# Altium PCB roboShieldMega.PcbDoc
Units mil, origin at the board's own origin, x right, y up, seen from the top; angles counter-clockwise.
Board outline 3683 x 2196 mil, 2 copper layers (Top Layer, Bottom Layer); 51 components, 90 nets, 261 pads, 2 vias.
Unrouted connection lines stored in the file: 1.
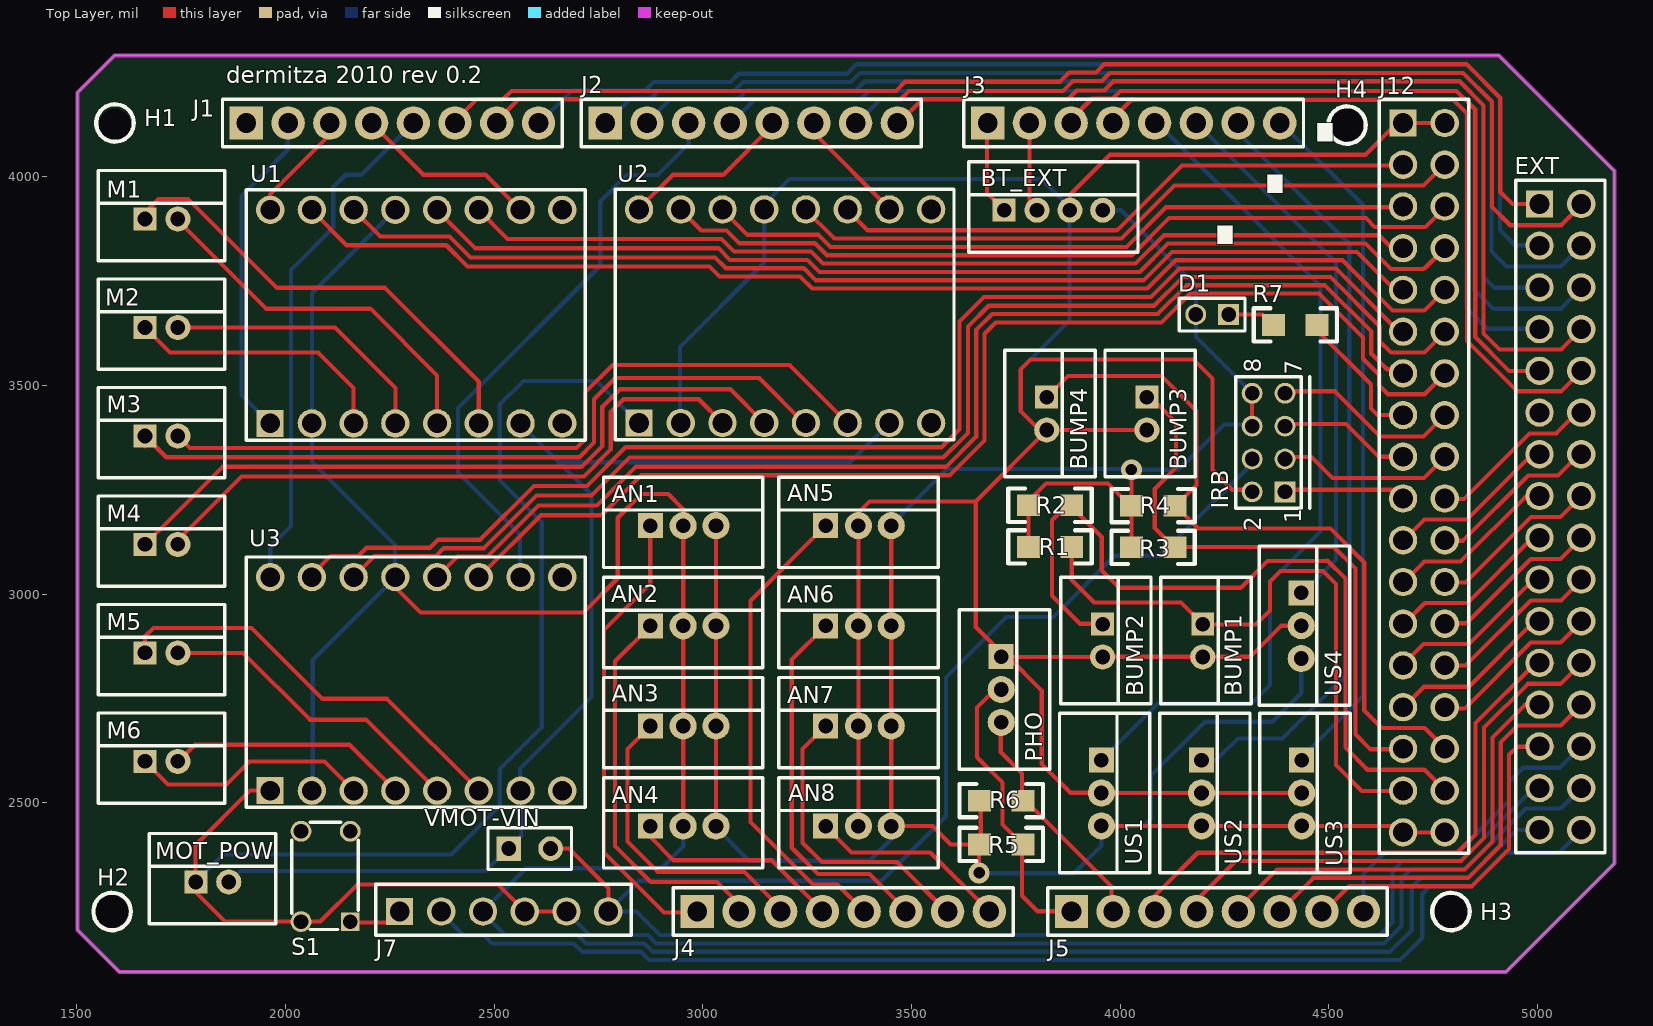
[diagram p0: Top Layer view]
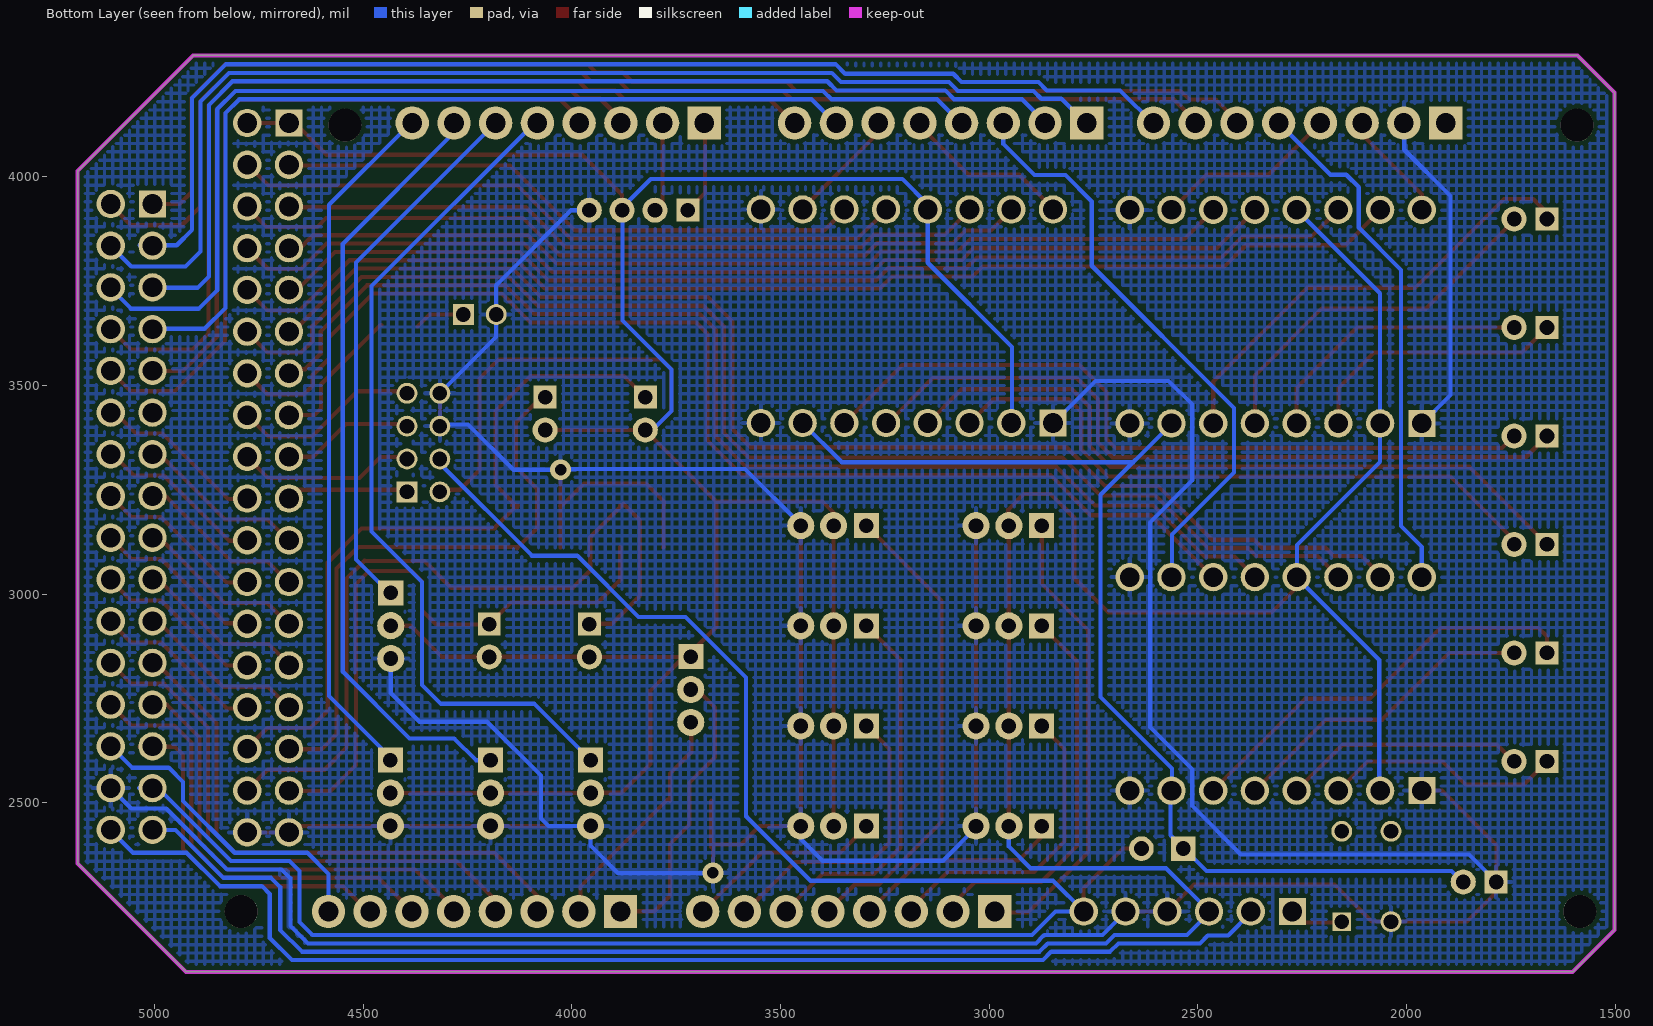
[diagram p1: Bottom Layer view, seen from below]

## Layer stack, top to bottom
Top Layer: signal copper 1.4
Dielectric: dielectric 12.6, FR-4, Dk 4.8
Bottom Layer: signal copper 1.4

## Board outline
1501,4202 1590,4291 4907,4291 5184,4014 5184,2354 4925,2095 1601,2095 1501,2195

## Design rules (kind name [scope] priority, off if disabled: settings)
Clearance [All] p1: gap=10
FabricationTestPointUsage TestPointUsage [All] p1: valid=0 allowmultiple=FALSE
FabricationTestpoint Testpoint [All] p1: side=3 testpointundercomponent=TRUE minsize=40 maxsize=100 preferedsize=60 minholesize=0 maxholesize=40 preferedholesize=32 testpointgrid=1 allowsidetop=TRUE allowsidebottom=TRUE usegrid=TRUE gridtolerance=0.01
PolygonConnect [All] p1: connectstyle=Relief reliefconductorwidth=10 reliefentries=4 polygonreliefangle="90 Angle"
RoutingVias [All] p1: holewidth=28 width=50 viastyle="Through Hole" minholewidth=28 minwidth=50 maxholewidth=28 maxwidth=50
SilkscreenOverComponentPads [All] p1: minsilkscreentomaskgap=10
SolderMaskExpansion [All] p1: expansion=4
Width [All] p1: maxlimit=10 minlimit=10 preferedwidth=10
25 further rules are at their usual default settings.

## Components (designator, comment, footprint, x,y, rotation, side; value= is the part's Value field where it differs from the comment)
AN1 "CON3" MOLEX_SH-3P-S 2874.01,3163.99 r0 top
AN2 "CON3" MOLEX_SH-3P-S 2874.01,2923.99 r0 top
AN3 "CON3" MOLEX_SH-3P-S 2874.01,2683.99 r0 top
AN4 "CON3" MOLEX_SH-3P-S 2874.01,2443.99 r0 top
AN5 "CON3" MOLEX_SH-3P-S 3294.01,3163.99 r0 top
AN6 "CON3" MOLEX_SH-3P-S 3294.01,2923.99 r0 top
AN7 "CON3" MOLEX_SH-3P-S 3294.01,2683.99 r0 top
AN8 "CON3" MOLEX_SH-3P-S 3294.01,2443.99 r0 top
BT_EXT "CON4" MOLEX_SH-4P-S 3722,3920 r0 top
BUMP1 "CON2" MOLEX_SH-2P-S 4198,2928 r270 top
BUMP2 "CON2" MOLEX_SH-2P-S 3958,2928 r270 top
BUMP3 "CON2" MOLEX_SH-2P-S 4064,3472 r270 top
BUMP4 "CON2" MOLEX_SH-2P-S 3824,3472 r270 top
D1 "LED" 2PIN_2MM 4260,3670 r180 top
EXT "CON32" 32PIN_2.54MM_DOUBLE 5055,3190 r270 top
H1 "SPACER" SPACER_MINI_2MM#1 1591.05,4128.99 r0 top
H2 "SPACER" SPACER_MINI_2MM#2 1584.12,2239.22 r0 top
H3 "SPACER" SPACER_MINI_2MM#2 4792.78,2239.22 r0 top
H4 "SPACER" SPACER_MINI_2MM#2 4543.81,4123.99 r0 top
IRB "CON8" WM18114 4395,3245 r90 top
J1 "CON8" 8PIN_2.54MM 1906.01,4128.99 r0 top
J2 "CON8" 8PIN_2.54MM 2766.01,4128.99 r0 top
J3 "CON8" 8PIN_2.54MM 3682.55,4128.99 r0 top
J4 "CON8" 8PIN_2.54MM 2986.49,2239.22 r0 top
J5 "CON8" 8PIN_2.54MM 3883.34,2239.22 r0 top
J7 "CON6" 6PIN_2.54MM_STRAIGHT 2273.1,2239.22 r0 top
J12 "CON36" 36PIN_2.54MM_DOUBLE 4728,3479 r270 top
M1 "CON2" MOLEX_SH-2P-S 1663.01,3898.99 r0 top
M2 "CON2" MOLEX_SH-2P-S 1663.01,3638.99 r0 top
M3 "CON2" MOLEX_SH-2P-S 1663.01,3378.99 r0 top
M4 "CON2" MOLEX_SH-2P-S 1663.01,3118.99 r0 top
M5 "CON2" MOLEX_SH-2P-S 1663.01,2858.99 r0 top
M6 "CON2" MOLEX_SH-2P-S 1663.01,2598.99 r0 top
MOT_POW "CON2" MOLEX_SH-2P-S 1785,2310 r0 top
PHO "CON3" MOLEX_SH-3P-S 3715,2850 r270 top
R1 "2.2k" 0805 3832,3113 r0 top
R2 "2.2k" 0805 3832,3213 r180 top
R3 "2.2k" 0805 4079,3112 r180 top
R4 "2.2k" 0805 4079,3212 r180 top
R5 "20k" 0805 3715,2400 r180 top
R6 "20k" 0805 3715,2505 r180 top
R7 "1k" 0805 4420,3645 r0 top
S1 "SW-SPST" PUSH_BUTTON_JPM 2155,2215 r90 top
U1 "TB6612FNG_BOARD" TB6612FNG_BOARD 1963.01,3408.99 r0 top
U2 "TB6612FNG_BOARD" TB6612FNG_BOARD 2847,3410 r0 top
U3 "TB6612FNG_BOARD" TB6612FNG_BOARD 1963.01,2528.99 r0 top
US1 "CON3" MOLEX_SH-3P-S 3955.01,2601.99 r270 top
US2 "CON3" MOLEX_SH-3P-S 4195.01,2601.99 r270 top
US3 "CON3" MOLEX_SH-3P-S 4435.01,2601.99 r270 top
US4 "CON3" MOLEX_SH-3P-S 4434,3003 r270 top
VMOT-VIN "Header 2" HDR1X2 2535,2390 r0 top

## Footprints (in the part's own frame and the unit in brackets; to place one, negate y for a bottom-side part, rotate by r counter-clockwise, add the part's x,y. Pads: shape width x height; smd on the part's side, far side on the other; paste and mask are expansions set on the pad)
2PIN_2MM [mil]
  rect 50x50 hole 35: 1(0,0)
  round 50 hole 35: 2(78.74,0)
  silkscreen extent -39,-39 118,39
6PIN_2.54MM_STRAIGHT [mil]
  rect 65x65 hole 47: 1(0,0)
  round 68 hole 47: 2(100,0) 3(200,0) 4(300,0) 5(400,0) 6(500,0)
  silkscreen extent -57,-57 555,65
8PIN_2.54MM [mil]
  rect 80x80 hole 47: 1(0,0)
  round 80 hole 47: 2(100,0) 3(200,0) 4(300,0) 5(400,0) 6(500,0) 7(600,0) 8(700,0)
  silkscreen extent -57,-57 757,57
32PIN_2.54MM_DOUBLE [mil]
  rect 65x65 hole 47: 1(-745,-50)
  round 68 hole 47: 2(-745,50) 3(-645,-50) 4(-645,50) 5(-545,-50) 6(-545,50) 7(-445,-50) 8(-445,50) 9(-345,-50) 10(-345,50) 11(-245,-50) 12(-245,50) 13(-145,-50) 14(-145,50) 15(-45,-50) 16(-45,50) 17(55,-50) 18(55,50) 19(155,-50) 20(155,50) 21(255,-50) 22(255,50) 23(355,-50) 24(355,50) 25(455,-50) 26(455,50) 27(555,-50) 28(555,50) 29(655,-50) 30(655,50) 31(755,-50) 32(755,50)
  silkscreen extent -802,-107 810,107
36PIN_2.54MM_DOUBLE [mil]
  rect 65x65 hole 47: 1(-650,-50)
  round 68 hole 47: 2(-650,50) 3(-550,-50) 4(-550,50) 5(-450,-50) 6(-450,50) 7(-350,-50) 8(-350,50) 9(-250,-50) 10(-250,50) 11(-150,-50) 12(-150,50) 13(-50,-50) 14(-50,50) 15(50,-50) 16(50,50) 17(150,-50) 18(150,50) 19(250,-50) 20(250,50) 21(350,-50) 22(350,50) 23(450,-50) 24(450,50) 25(550,-50) 26(550,50) 27(650,-50) 28(650,50) 29(750,-50) 30(750,50) 31(850,-50) 32(850,50) 33(950,-50) 34(950,50) 35(1050,-50) 36(1050,50)
  silkscreen extent -707,-107 1100,107
0805 [mil]
  rect 55x52 smd: 1(-52,0) 2(52,0)
  silkscreen extent -100,-40 100,40
HDR1X2 [mm] "Connector; Header; 2 Position"
  rect 1.5x1.5 hole 0.9: 1(0,0)
  round 1.5 hole 0.9: 2(2.54,0)
  silkscreen extent -1.27,-1.27 3.81,1.27
MOLEX_SH-2P-S [mil] "Molex Sherlock 2 mm 2 pin straight header"
  rect 55x55 hole 35: 1(0,0)
  round 60 hole 35: 2(78.74,0)
  silkscreen extent -112,-100 191,116
MOLEX_SH-3P-S [mil] "Molex Sherlock 2 mm 3 pin straight header"
  rect 60x60 hole 35: 1(0,0)
  round 65 hole 35: 2(78.74,0) 3(157.48,0)
  silkscreen extent -112,-100 270,116
MOLEX_SH-4P-S [mil] "Molex Sherlock 2 mm 4 pin straight header"
  rect 55x55 hole 35: 1(0,0)
  round 60 hole 35: 2(78.74,0) 3(157.48,0) 4(236.22,0)
  silkscreen extent -85,-100 321,116
PUSH_BUTTON_JPM [mil] "JPM Push Button Distrelec 201540"
  rect 45x45 hole 35: 1(0,0)
  round 50 hole 35: 2(0,118.11) ""(216.54,0) ""(216.54,118.11)
  silkscreen extent -19,-19 238,140
SPACER_MINI_2MM#1 [mm]
  round 2 hole 2: ""(0,-0.127)
  silkscreen extent -1.14,-1.14 1.14,1.14
SPACER_MINI_2MM#2 [mm]
  round 2 hole 2: ""(0,0)
  silkscreen extent -1.14,-1.14 1.14,1.14
TB6612FNG_BOARD [mil]
  rect 65x65 hole 47: 1(0,0)
  round 68 hole 47: 2(100,0) 3(200,0) 4(300,0) 5(400,0) 6(500,0) 7(600,0) 8(700,0) 9(700,511.81) 10(600,511.81) 11(500,511.81) 12(400,511.81) 13(300,511.81) 14(200,511.81) 15(100,511.81) 16(0,511.81)
  silkscreen extent -57,-40 755,560
WM18114 [mm]
  rect 1.27x1.27 hole 0.889: 1(0,0)
  round 1.27 hole 0.889: 2(0,2) 3(2,0) 4(2,2) 5(4,0) 6(4,2) 7(6,0) 8(6,2)
  silkscreen extent -1,-1.5 7,3

## Part data
AN1 AN2 AN3 AN4 AN5 AN6 AN7 AN8 PHO US1 US2 US3 US4: "3 pin header"
BT_EXT: "4 pin header"
BUMP1 BUMP2 BUMP3 BUMP4 M1 M2 M3 M4 M5 M6 MOT_POW: "2 pin header"
D1: "General LED"
EXT J12: "Connector"
H1 H2 H3 H4: "0.25 x 4-40 spacer hole"
IRB J1 J2 J3 J4 J5: "8 pin header"
J7: "6 pin header"
R1 R2 R3 R4 R5 R6 R7: library part RES, "Generic Resistor"
U1 U2 U3: "H-Bridge dual  board from Pololu, with TB6612FNG chip"
VMOT-VIN: "Header, 2-Pin"

## Via types
v1: diameter 50, hole 28, Top Layer to Bottom Layer, 2 vias

## Nets (pads, with @x,y where several pads share a name; then routed paths per layer and width w, separated by ;. In a path a pad name is that pad's centre, name@x,y a point inside that pad or via, vN(x,y) a via of type N, cw(c..) or ccw(c..) an arc to the next point about the centre after c; other vN are vias at no path point)
3.3V: EXT.32 J7.2 | length 2989.5
  Top Layer w10: J7.2@2372,2221 J7.2@2372,2238
  Bottom Layer w10: J7.2@2371,2237 2372,2237 2427,2182 2476,2182 2495,2163 2690,2163 2710,2143 2851,2143 2871,2123 4671,2123 4724,2176 4724,2281 4743,2300 4843.5,2300 4923.5,2380 5052,2380 EXT.32@5106,2434
GND: AN1.3 AN2.3 AN3.3 AN4.3 AN5.3 AN6.3 AN7.3 AN8.3 BT_EXT.4 D1.2 EXT.30 IRB.6 IRB.8 J1.2 J7.4 J7.5 J12.35 J12.36 MOT_POW.1 R1.1 R2.2 R3.2 R4.2 R5.2 R6.2 S1.2 U1.1 U1.8 U1.9 U2.1 U2.8 U2.9 U3.1 U3.8 U3.9 US1.3 US2.3 US3.3 US4.3 | length 13659.3
  Top Layer w10: U3.1 1914.99,2528.99 1784,2398 1784,2286 1855,2215 2083,2215 2172,2304 2509,2304 J7.4@2577,2236 ; J7.4 2670.78,2239.22 J7.5@2672,2238 ; AN3.3@3016.49,2683.99 AN3.3@3021.49,2688.99 ; AN4.3 AN1.3 AN1.3@3031.99,3163.99 ; AN8.3@3451.49,2441 AN5.3 ; AN8.3 3550.01,2443.99 3594,2400 R5.2@3661,2400 ; R5.2@3661,2401 3662,2400 v1(3662,2332) ; R6.2@3665,2505 3666,2504 R5.2@3666,2394 ; R1.1@3779,3114 R1.1@3781,3112 ; R1.1 3780,3214 3779,3215 3779,3222 3822,3265 3971,3265 R4.2@4025,3211 ; US1.3 US2.3 ; R3.2 R4.2@4027,3211 ; v1(4027,3298) R4.2 R4.2@4028,3211 ; US2.3@4195,2444 4663,2444 J12.35@4679,2428 ; IRB.8@4316.26,3486.22 4316.26,3406.74 IRB.6@4317,3406 ; J12.35 J12.36
  Bottom Layer w10: MOT_POW.1@1782,2308 1850,2376 2397,2376 2513,2492 2513,2580 2614,2681 2614,3172 2513,3273 2513,3454 2570,3511 2745,3511 2846,3410 U2.1 ; U1.1@1964,3407 1894,3477 1894,3954 2005,4065 J1.2@2005,4127 ; J1.2@2008,4107 J1.2@2008,4129 ; J7.5 2673.1,2237.9 2728,2183 2868,2183 2888,2163 4632,2163 4674,2205 4674,2318 4696,2340 4826,2340 4972,2486 5056,2486 EXT.30@5106,2536 ; AN4.3@3028,2444 3111,2361 3399,2361 3451.49,2413.49 AN8.3 ; AN5.3@3449,3164 3585,3300 v1@4028,3300 ; v1@3660,2331 3889,2331 3955.01,2397.01 US1.3 ; US1.3@3955,2444 4056,2444 4074,2462 4074,2565 4203,2694 4365,2694 4434,2763 US4.3 ; BT_EXT.4 4002,3920 4182,3740 4182,3616 IRB.8@4317,3481 ; v1(4027,3298) 4140,3298 4248.74,3406.74 IRB.6@4316.26,3406.74
NetAN1_1: AN1.1 J4.1 | length 1112.6
  Top Layer w10: AN1.1 2874.01,3025.01 2763,2914 2763,2381 2907,2237 J4.1@2987,2237
NetAN2_1: AN2.1 J4.2 | length 936.6
  Top Layer w10: AN2.1 2789.01,2838.99 2789.01,2395.99 2875,2310 3034,2310 3089,2255 J4.2@3089,2240
NetAN3_1: AN3.1 J4.3 | length 739.7
  Top Layer w10: AN3.1 2819.01,2628.99 2819.01,2406.99 2892,2334 3100,2334 J4.3@3191,2243
NetAN4_1: AN4.1 J4.4 | length 514.1
  Top Layer w10: AN4.1 2874.01,2417.99 2930,2362 3165,2362 J4.4@3288,2239
NetAN5_1: AN5.1 J4.5 | length 1146.6
  Top Layer w10: AN5.1 3114.01,2983.99 3114.01,2453.99 3264,2304 3322,2304 J4.5@3387,2239
NetAN6_1: AN6.1 J4.6 | length 904.9
  Top Layer w10: AN6.1 3213,2842.98 3213,2392 3276,2329 3399,2329 J4.6@3489,2239
NetAN7_1: AN7.1 J4.7 | length 721.8
  Top Layer w10: AN7.1 3239.01,2628.99 3239.01,2403.99 3285,2358 3465,2358 J4.7@3588,2235
NetAN8_1: AN8.1 J4.8 | length 478.5
  Top Layer w10: AN8.1 3294.01,2442.99 3356,2381 3545,2381 J4.8@3687,2239
NetBT_EXT_1: BT_EXT.1 J3.1 | length 255
  Top Layer w10: J3.1@3681,4129 3681,3961 BT_EXT.1 ; J3.1 J3.1@3682.55,4149.55
  Bottom Layer w10: J3.1 J3.1@3690.99,4128.99
NetBT_EXT_2: BT_EXT.2 J3.2 | length 244.8
  Top Layer w10: J3.2@3782.55,4156.55 3782.55,3936.45 BT_EXT.2@3800,3919
NetBUMP1_1: BUMP1.1 J12.33 R1.2 | length 1483.9
  Top Layer w10: R1.2 3884,3034 3938,2980 4146,2980 BUMP1.1 ; BUMP1.1@4198,2927 4325,2927 4359,2961 4359,3030 4384,3055 4486,3055 4517,3024 4517,2590 4579,2528 J12.33@4679,2528
NetBUMP2_1: BUMP2.1 J12.34 R2.1 | length 1921.4
  Top Layer w10: R2.1@3873,3213 R2.1 ; BUMP2.1@3959,2929 3904,2929 3837,2996 3837,3177 3876.5,3216.5 3956,3137 3956,3057 3998,3015 4289,3015 4353,3079 4496,3079 ; 4497,3080 4540,3037 4540,2632 4593,2579 4729,2579 J12.34@4779,2529
NetBUMP3_1: BUMP3.1 J12.31 R3.1 | length 1421.7
  Top Layer w10: BUMP3.1 4073,3472 4134,3411 4134,3303 4083,3252 4083,3158 R3.1@4131,3110 ; R3.1@4130,3113 4512,3113 4564,3061 4564,2664 4600,2628 J12.31@4681,2628
NetBUMP4_1: BUMP4.1 J12.32 R4.1 | length 1778.5
  Top Layer w10: BUMP4.1 3875,3523 4099,3523 4183,3439 4183,3261 R4.1@4130,3208 ; R4.1@4129,3212 R4.1@4143,3212 ; R4.1@4133,3211 4186,3158 ; 4185,3157 4504,3157 4585,3076 4585,2721 4627,2679 4730,2679 J12.32@4780,2629
NetD1_1: D1.1 R7.1 | length 122
  Top Layer w10: D1.1 4341,3670 R7.1@4370,3641
NetEXT_1: EXT.1 J1.6 | length 2931.9
  Top Layer w10: J1.6 2406.01,4134.01 2457,4185 2520,4185 2541,4206 3463,4206 3485,4228 3856,4228 3878,4250 3942,4250 3962,4270 4830,4270 4911,4189 4911,3964 4940,3935 EXT.1@5006,3935
NetEXT_2: EXT.2 J1.7 | length 2973.2
  Top Layer w10: J1.7 2506.01,4134.01 2558,4186 3474,4186 3494,4206 3863,4206 3887,4230 3956,4230 3975,4249 4822,4249 4891,4180 4891,3928 4935,3884 5057,3884 EXT.2@5107,3934
NetEXT_3: EXT.3 J1.8 | length 2856.9
  Bottom Layer w10: J1.8@2604,4125 2686,4207 2862,4207 2882,4227 3066,4227 3086,4247 3345,4247 3368,4270 4829,4270 4910,4189 4910,3873 4947,3836 EXT.3@5036,3836
NetEXT_4: EXT.4 J2.1 | length 2817.9
  Bottom Layer w10: J2.1@2765,4125 2827,4187 2875,4187 2894,4206 3075,4206 3096,4227 3355,4227 3377,4249 4821.5,4249 4890,4180.5 4890,3821 4926,3785 5056,3785 EXT.4@5106,3835 ; J2.1 J2.1@2766.01,4131.01
NetEXT_5: EXT.5 J2.2 | length 2630.6
  Bottom Layer w10: J2.2@2863,4128 2921,4186 3084,4186 3105,4207 3366,4207 3388,4229 4813,4229 4870,4172 4870,3761 4897,3734 EXT.5@5004,3734 ; J2.2 J2.2@2867.99,4128.99
NetEXT_6: EXT.6 J2.4 | length 2569.7
  Bottom Layer w10: J2.4@3065,4126 3125,4186 3378,4186 3398,4206 4806,4206 4850,4162 4850,3728 4894,3684 5057,3684 EXT.6@5108,3735 ; J2.4 J2.4@3067.99,4128.99
NetEXT_7: EXT.7 J2.7 | length 2162
  Bottom Layer w10: J2.7@3369,4129 3426,4186 4797,4186 4830,4153 4830,3686 4880,3636 EXT.7@5006,3636
NetEXT_8: EXT.8 J2.8 | length 2285.2
  Top Layer w10: J2.8@3468,4128 3526,4186 3875,4186 3896,4207 3962,4207 3984,4229 4813,4229 4871,4171 4871,3624.56 4909.56,3586 5057,3586 EXT.8@5105,3634
NetEXT_9: EXT.9 J3.3 | length 1758.6
  Top Layer w10: J3.3 3882.55,4137.55 3932,4187 3982,4187 4001,4206 4806,4206 4851,4161 4851,3616 4932,3535 EXT.9@5007,3535
NetEXT_10: EXT.10 J3.4 | length 1786.5
  Top Layer w10: J3.4 3982.55,4140.55 4028,4186 ; 4024,4184 4799,4184 4831,4152 4831,3607 4952,3486 5057,3486 EXT.10@5106,3535
NetEXT_12: EXT.12 J12.20 | length 412.3
  Top Layer w10: J12.20@4776,3228 4824,3228 4981,3385 5045,3385 5094,3434 EXT.12@5103,3434
NetEXT_13: EXT.13 J12.21 | length 419.7
  Top Layer w10: J12.21@4678,3128 4729,3179 4831,3179 4987,3335 EXT.13 ; J12.21 J12.21@4685,3129
NetEXT_14: EXT.14 J12.22 | length 411.2
  Top Layer w10: J12.22@4778,3128 4822,3128 4978,3284 5049,3284 5101,3336 EXT.14@5103,3336
NetEXT_15: EXT.15 J12.23 | length 427.7
  Top Layer w10: J12.23@4677,3026 4729,3078 4816,3078 4971,3233 EXT.15@5005,3233 ; J12.23 J12.23@4692,3029
NetEXT_16: EXT.16 J12.24 | length 411.2
  Top Layer w10: J12.24@4781,3028 4828,3028 4985,3185 5055,3185 EXT.16@5106,3236
NetEXT_17: EXT.17 J12.25 | length 418.2
  Top Layer w10: J12.25@4676,2928 J12.25@4680,2928 ; J12.25@4678,2927 4730,2979 4832,2979 4988,3135 EXT.17@5006,3135
NetEXT_18: EXT.18 J12.26 | length 412.9
  Top Layer w10: J12.26@4778,2930 4830,2930 4984,3084 5055,3084 EXT.18@5106,3135
NetEXT_19: EXT.19 J12.27 | length 417.2
  Top Layer w10: J12.27@4674,2827 4727,2880 4836,2880 4991,3035 EXT.19
NetEXT_20: EXT.20 J12.28 | length 417.3
  Top Layer w10: J12.28@4775,2829 4828,2829 4984,2985 5057,2985 EXT.20@5107,3035
NetEXT_21: EXT.21 J12.29 | length 413.3
  Top Layer w10: J12.29@4677,2727 4728,2778 4836,2778 4991,2933 EXT.21@5005,2933
NetEXT_22: EXT.22 J12.30 | length 416.6
  Top Layer w10: J12.30@4777,2726 4826,2726 4984,2884 5056,2884 EXT.22@5107,2935
NetEXT_23: EXT.23 J5.3 | length 1378.2
  Top Layer w10: J5.3 4083.34,2277.34 4186,2380 4808,2380 4852,2424 4852,2691 4996,2835 EXT.23@5036,2835
NetEXT_24: EXT.24 J5.4 | length 1340.8
  Top Layer w10: J5.4 4183.34,2266.34 4277,2360 4816.63,2360 4872,2415.38 4872,2680 4977,2785 5055,2785 EXT.24@5106,2836
NetEXT_25: EXT.25 J5.5 | length 1079.6
  Top Layer w10: J5.5 4283.34,2247.34 4376,2340 4825,2340 4892,2407 4892,2656 4971,2735 EXT.25@5007,2735
NetEXT_26: EXT.26 J5.6 | length 1075.7
  Top Layer w10: J5.6@4384,2236 4384,2241 4463,2320 4834,2320 4912,2398 4912,2644 4953,2685 5056,2685 EXT.26@5106,2735
NetEXT_27: EXT.27 J5.7 | length 848.6
  Top Layer w10: J5.7 4488.22,2239.22 4549,2300 4843,2300 4932,2389 4932,2615 4951,2634 EXT.27@5036,2634
NetEXT_28: EXT.28 J5.8 | length 766.7
  Bottom Layer w10: J5.8 4583.34,2329.34 4634,2380 4808,2380 4932,2504 4932,2550 4966,2584 5054,2584 EXT.28@5106,2636
NetIRB_1: IRB.1 J12.19 | length 293.1
  Top Layer w10: IRB.1@4395,3250 4657,3250 J12.19@4679,3228
NetIRB_3: IRB.3 J12.18 | length 424.7
  Top Layer w10: IRB.3@4395,3328.74 4458.26,3328.74 4509,3278 4728,3278 J12.18@4778,3328
NetIRB_5: IRB.5 J12.17 | length 312.5
  Top Layer w10: IRB.5@4396,3407.48 4541.52,3407.48 4620,3329 J12.17@4676,3329
NetIRB_7: IRB.7 J12.16 | length 445.3
  Top Layer w10: IRB.7@4397,3486.22 4512,3486.22 ; 4515,3486 4623,3378 4727,3378 J12.16@4779,3430
NetJ1_1: J1.1
NetJ1_3: J1.3 U1.16 | length 266.4
  Top Layer w10: U1.16 1963.01,3958.01 2106,4101 J1.3@2106,4128
NetJ1_4: J1.4 U1.10 | length 443.3
  Top Layer w10: J1.4 2330,4005 2478.81,4005 U1.10
NetJ1_5: J1.5 U3.16 | length 1252.3
  Bottom Layer w10: U3.16@1963,3041 1963,3113 2013,3163 2013,3777 2114,3878 2114,3975 2144,4005 2182,4005 J1.5
NetJ2_3: J2.3 U3.10 | length 1439.4
  Bottom Layer w10: 2413,3292 2413,3446 2754,3787 2754,3941 2817,4004 2891,4004 2966.01,4079.01 J2.3 J2.3@2985.99,4128.99 ; 2413.5,3291.5 2562,3143 U3.10@2562,3043
NetJ2_5: J2.5 U2.16 | length 408.8
  Top Layer w10: U2.16@2846,3923 2928,4005 3049,4005 J2.5@3170.5,4126.5
NetJ2_6: J2.6 U2.10 | length 290.8
  Top Layer w10: J2.6 3266.01,4104.99 U2.10@3449,3922
  Bottom Layer w10: J2.6 J2.6@3266.01,4137.01
NetJ3_5: J3.5 US1.1 | length 2048.1
  Top Layer w10: J3.5 J3.5@4083.99,4128.99
  Bottom Layer w10: US1.1 4090,2737 4314,2737 4359,2782 4359,3029 4480,3150 4480,3738 4089,4129 J3.5@4080,4129
NetJ3_6: J3.6 US4.1 | length 1334.9
  Top Layer w10: J3.6 J3.6@4188.99,4128.99 ; US4.1@4434,3008 US4.1@4459,3008
  Bottom Layer w10: J3.6@4183,4130 4183,4129 4517,3795 4517,3083 4437,3003 US4.1@4432,3003
NetJ3_7: J3.7 US2.1 | length 1879.4
  Top Layer w10: J3.7@4281,4131 J3.7@4294,4131
  Bottom Layer w10: US2.1 4229.99,2601.99 4282,2654 4389,2654 4549,2814 4549,3839 4282,4106 J3.7@4282,4128
NetJ3_8: J3.8 US3.1 | length 1672.7
  Bottom Layer w10: J3.8@4382,4128 4387,4128 4582,3933 4582,2756 US3.1@4430,2604
NetJ5_1: J5.1 PHO.2 R5.1 | length 712
  Top Layer w10: PHO.2@3725,2773.74 3702.74,2773.74 3657,2728 3657,2609 3718,2548 3718,2448 R5.1@3765,2401 ; R5.1@3765,2399 3765,2277 3802,2240 J5.1@3881,2240
NetJ5_2: J5.2 PHO.3 R6.1 | length 555
  Top Layer w10: PHO.3@3714,2684 3714,2621 3765,2570 R6.1@3765,2504 ; R6.1@3770.5,2507.5 3979,2299 J5.2@3979,2240
NetJ7_1: J7.1 S1.1 | length 134.2
  Top Layer w10: S1.1@2151,2213 2249,2213 2273.1,2237.1 J7.1
NetJ12_3: J12.3 U2.11 | length 1419.2
  Top Layer w10: U2.11@3344,3923 3395,3872 3992,3872 3994,3874 3995,3874 4148,4027 4675,4027 J12.3@4677,4029
NetJ12_4: J12.4 U2.12 | length 1635.7
  Top Layer w10: U2.12@3244,3923 3315,3852 4003,3852 4130,3979 4727,3979 J12.4@4777,4029
NetJ12_5: J12.5 U2.14 | length 1707.6
  Top Layer w10: U2.14@3046,3922 3107,3861 3277,3861 3306,3832 4015,3832 4110,3927 J12.5@4677,3927
NetJ12_6: J12.6 U2.15 | length 1946
  Top Layer w10: U2.15@2945,3922 2996,3871 3057,3871 3087,3841 3268,3841 3297,3812 4028,3812 4117,3901 4589,3901 4610,3880 4732,3880 J12.6@4780,3928
NetJ12_7: J12.7 U1.11 | length 2310.8
  Top Layer w10: U1.11 2463.01,3919.99 2532,3851 3044.25,3851 3074.25,3821 3259.25,3821 3288.25,3792 4037,3792 4105,3860 4620,3860 4651,3829 J12.7@4679,3829
NetJ12_8: J12.8 U1.12 | length 2549.4
  Top Layer w10: U1.12 2363.01,3919.99 2454,3829 3037,3829 3065,3801 3250.25,3801 3279.25,3772 4047,3772 4115,3840 4588,3840 4649,3779 4727,3779 4729,3781 4730,3781 J12.8@4776,3827 ; 4625,3802 4625,3803
NetJ12_9: J12.9 U1.14 | length 2630.4
  Top Layer w10: U1.14 2163.2,3920.8 2227,3857 2393,3857 2443,3807 3029,3807 3055,3781 3241.88,3781 3270.88,3752 4056,3752 4124,3820 4568,3820 J12.9@4658,3730
NetJ12_10: J12.10 U1.15 | length 2891
  Top Layer w10: U1.15 2063.01,3918.99 2146,3836 2385,3836 2436,3785 3016,3785 3040,3761 3233,3761 3262,3732 4065,3732 4133,3800 4533,3800 4653,3680 4729,3680 J12.10@4777,3728
NetJ12_11: J12.11 U3.15 | length 3138.1
  Top Layer w10: U3.15@2062,3045 2108,3091 2174,3091 2194,3111 2346,3111 2365.12,3130.12 2466.12,3130.12 2595,3259 2722,3259 2815,3352 3572,3352 3615,3395 3615,3653 3674,3712 4073.8,3712 4141.8,3780 4517,3780 4667,3630 J12.11@4681,3630 ; J12.11@4677,3625 J12.11@4678,3626
NetJ12_12: J12.12 U3.14 | length 3180.2
  Top Layer w10: U3.14 2163.01,3041.01 2213,3091 2360,3091 2379.03,3110.03 2475.17,3110.03 2601.14,3236 2733,3236 2824,3327 3576,3327 3635,3386 3635,3641 3685,3691 4081.5,3691 4150.5,3760 4504,3760 4622,3642 4622,3606 4649,3579 4729,3579 J12.12@4779,3629
NetJ12_13: J12.13 U3.12 | length 2865.8
  Top Layer w10: U3.12 2363.01,3041.01 2412,3090 2484,3090 2606,3212 2746,3212 2839,3305 3583,3305 3655,3377 3655,3632.59 3693.41,3671 4090,3671 4159,3740 4491,3740 4602,3629 4602,3576 4639,3539 J12.13@4675,3539
NetJ12_14: J12.14 U3.11 | length 2910.5
  Top Layer w10: U3.11 2463.8,3040.8 2612,3189 2757,3189 2853,3285 3592,3285 3675,3368 3675,3624 3702,3651 4099,3651 4168,3720 4477,3720 4582,3615 4582,3564 4621,3525 4621,3500 4642,3479 4730,3479 ; 4730,3480 J12.14@4778,3528
NetJ12_15: J12.15 R7.2 | length 343.4
  Top Layer w10: R7.2@4457,3645 4459,3645 4601,3503 4601,3445 4617,3429 J12.15@4677,3429
NetM1_1: M1.1 U1.6 | length 1130.1
  Top Layer w10: M1.1@1663.01,3878.99 1663.01,3913.99 1696.02,3947 1766,3947 1979.01,3733.99 2238.01,3733.99 2463.01,3508.99 U1.6
NetM1_2: M1.2 U1.5 | length 915
  Top Layer w10: M1.2@1756.75,3883.99 M1.2 1741.75,3895.25 1953.01,3683.99 2203.01,3683.99 2363.01,3523.99 U1.5
NetM2_1: M2.1 U1.3 | length 645.1
  Top Layer w10: M2.1 1723.01,3578.99 2078.01,3578.99 2163.01,3493.99 U1.3
NetM2_2: M2.2 U1.4 | length 666.3
  Top Layer w10: M2.2 2118.01,3638.99 2263.01,3493.99 U1.4
NetM3_1: M3.1 U2.5 | length 1811.9
  Top Layer w10: M3.1@1663.01,3353.99 M3.1 1714,3328 2704,3328 2739,3363 2739,3467 2790,3518 3135,3518 U2.5@3244,3409
NetM3_2: M3.2 U2.6 | length 1822.9
  Top Layer w10: M3.2 1770.74,3350 2697,3350 2719,3372 2719,3484 2784,3549 3208,3549 U2.6
NetM4_1: M4.1 U2.4 | length 1728.4
  Top Layer w10: M4.1 1849,3305 2709.47,3305 2759,3354.53 2759,3449 2801,3491 3066,3491 U2.4@3148,3409
NetM4_2: M4.2 U2.3 | length 1548.1
  Top Layer w10: M4.2 M4.2@1758.01,3118.99 ; M4.2@1742,3119 1742,3130 1894,3282 2714.81,3282 2779,3346.19 2779,3436 2810,3467 2990,3467 U2.3
NetM5_1: M5.1 U3.6 | length 1009.8
  Top Layer w10: M5.1 1663.01,2898.99 1683.01,2918.99 1918.01,2918.99 2088.01,2748.99 2243.01,2748.99 U3.6
NetM5_2: M5.2 U3.5 | length 758
  Top Layer w10: M5.2 1898.01,2858.99 2058.01,2698.99 2193.01,2698.99 U3.5
NetM6_1: M6.1 U3.3 | length 574.6
  Top Layer w10: M6.1 1718.01,2543.99 1858.01,2543.99 1913.01,2598.99 2093.01,2598.99 U3.3
NetM6_2: M6.2 U3.4 | length 583.4
  Top Layer w10: M6.2 1743.01,2598.99 1783.01,2638.99 2153.01,2638.99 U3.4
VCC: AN1.2 AN2.2 AN3.2 AN4.2 AN5.2 AN6.2 AN7.2 AN8.2 BT_EXT.3 BUMP1.2 BUMP2.2 BUMP3.2 BUMP4.2 EXT.31 IRB.2 J7.3 J12.1 J12.2 PHO.1 U1.2 U1.13 U2.2 U2.13 U3.2 U3.13 US1.2 US2.2 US3.2 US4.2 | length 14403.9
  Top Layer w10: U3.13 2263.01,3015.99 2323,2956 2714,2956 2796,3038 2796,3183 2853,3240 2917,3240 2954,3203 AN1.2@2954,3164 ; J7.3@2473.1,2209.9 J7.3 ; AN3.2@2937.75,2683.99 AN3.2@2942.75,2688.99 ; AN4.2 AN1.2 ; AN5.2@3352.75,3178.99 AN5.2@3352.75,3181.46 ; AN8.2 3372.75,3195.75 3399,3222 3654,3222 ; PHO.1@3723,2850 3723.74,2849.26 BUMP2.2 ; PHO.1@3723,2851 3730,2851 3812,2769 3812,2593 3881,2524 US1.2@3954,2524 ; PHO.1@3724,2851 3654,2921 3654,3222 ; BUMP4.2@3822,3392 3808,3392 3762,3438 3762,3539 3785,3562 4176,3562 4221,3517 4221,3297 4268,3250 IRB.2@4317,3250 ; BUMP4.2 4061.74,3393.26 BUMP3.2@4064,3391 ; BUMP4.2@3826,3394 3654,3222 ; BT_EXT.3@3880,3917 3880,3957 3976,4053 4588,4053 4665,4130 4676,4130 4677,4129 J12.2 ; US1.2 US3.2 ; BUMP2.2@3958,2849 3959,2850 4312,2850 4386.26,2924.26 US4.2 ; BUMP1.2@4195,2849 BUMP1.2@4196,2850
  Bottom Layer w10: U3.2@2065,2530 2065,2842 U3.13@2264,3041 ; U3.13@2262,3044 2262,3118 2063.01,3316.99 2063.01,3721.01 U1.13@2264,3922 ; J7.3@2471,2238 2576,2343 2901,2343 2952.75,2394.75 AN4.2 ; J7.3 2473.1,2235.9 2526,2183 2699.72,2183 2719.72,2163 2859.5,2163 2879.5,2143 4647,2143 4699,2195 4699,2298 4721,2320 4835,2320 4950,2435 EXT.31@5004,2435 ; U2.2@2952,3399 2945,3406 2945,3592 3147,3794 3147,3934 3208,3995 3811,3995 3879,3927 3879,3656 3761,3538 3761,3439 3810,3390 BUMP4.2@3823,3390
VIN: EXT.29 IRB.4 J7.6 VMOT-VIN.2 | length 4937.6
  Top Layer w10: VMOT-VIN.2 2679,2390 2774,2295 J7.6@2774,2239 ; J7.6 J7.6@2773.78,2239.22
  Bottom Layer w10: J7.6@2773,2239 2847,2313 3428,2313 3582,2467 3582,2468 3583,2469 3583,2800 3728,2945 3840,2945 3987,3092 4096,3092 4316.26,3312.26 IRB.4@4316.26,3328.74 ; J7.6@2773.78,2239.22 2840.78,2239.22 2897,2183 4622,2183 4653,2214 4653,2336 4677,2360 4817,2360 4992,2535 EXT.29@5037,2535
VMOT: MOT_POW.2 U1.7 U2.7 U3.7 VMOT-VIN.1 | length 2707.8
  Bottom Layer w10: MOT_POW.2@1864,2308 1892,2336 2479,2336 2565,2422 U3.7@2565,2527 ; U3.7@2562,2529 2562,2582 2733,2753 2733,3238 2563.01,3407.99 U1.7 ; 2654,3316 3353,3316 U2.7@3448,3411
pads on no net: EXT.11 H1. H2. H3. H4. S1.

## Polygon pours and split planes (outlines as drawn)
GND on Bottom Layer "gnd plane" (hatched 90Degree grid 20 track 8, remove dead copper, pour order 1000): 1501,4202 1501,2196 1602,2095 4926,2095 5184,2353 5184,4015 4908,4291 1592,4291 1503,4202

## Keep-outs
Keep-Out Layer:
  lines w10: 1501,2195 1501,4202 1590,4291 4908,4291 5185,4014 5185,2354 4925,2094 1602,2094 1501,2195

## Silkscreen, mask and mechanical layers (free items; w line width, h text height)
Top Overlay:
  text "dermitza 2010 rev 0.2" at 1858,4224 h40
  text "⋰" at 4192,3784 h450

## Dimensions
4767,4287.44 to 4784,2098.44 on Top Overlay
1511.44,2444 to 5182.44,2603 on Top Overlay

## Text inside footprints (layer, text, board x,y; h text height)
IRB: Top Overlay "7" at 4435,3526 h40 r90; Top Overlay "8" at 4338,3531 h40 r90; Top Overlay "2" at 4337.91,3150.51 h40 r90; Top Overlay "1" at 4434.37,3170.2 h40 r90